# Altium PCB Tesla_Girafe.PcbDoc
Units mm, origin at the board's own origin, x right, y up, seen from the top; angles counter-clockwise.
Board outline 36 x 50 mm, 2 copper layers (Top Layer, Bottom Layer); 12 components, 12 nets, 69 pads, 0 vias.
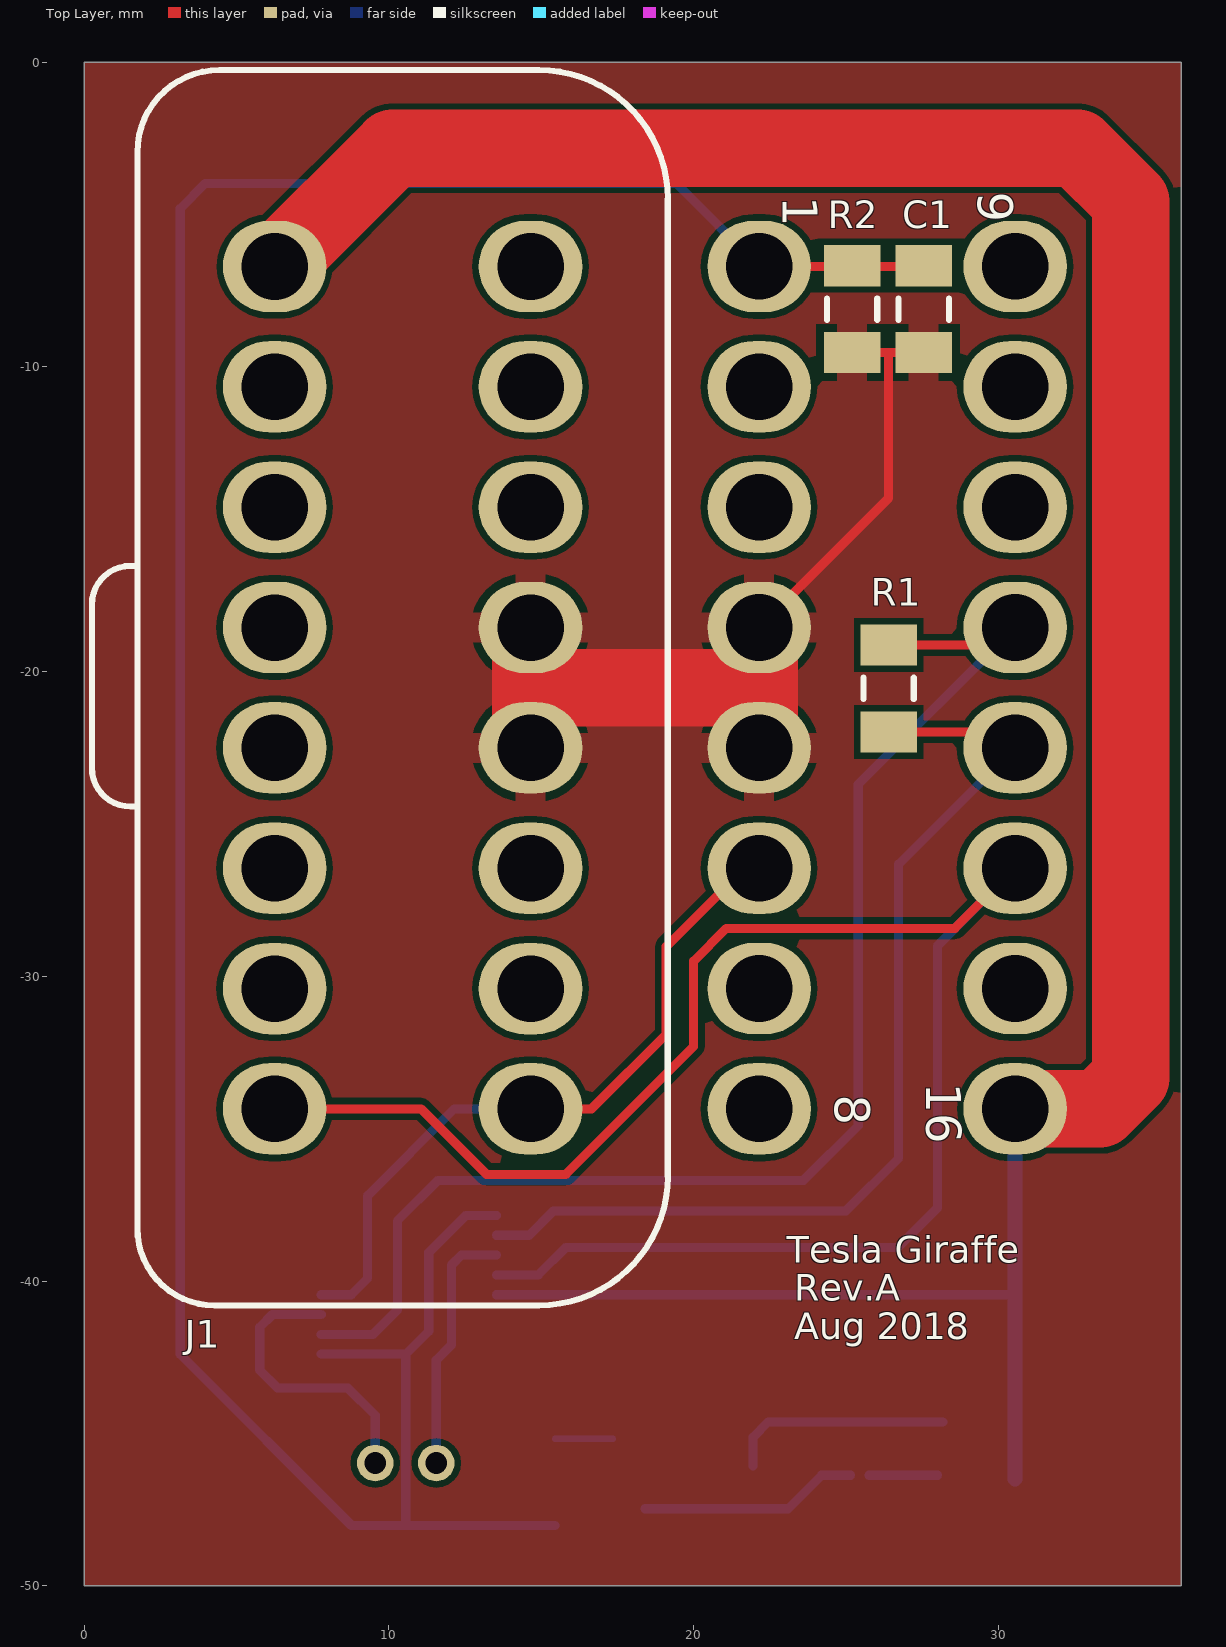
[diagram p0: Top Layer view]
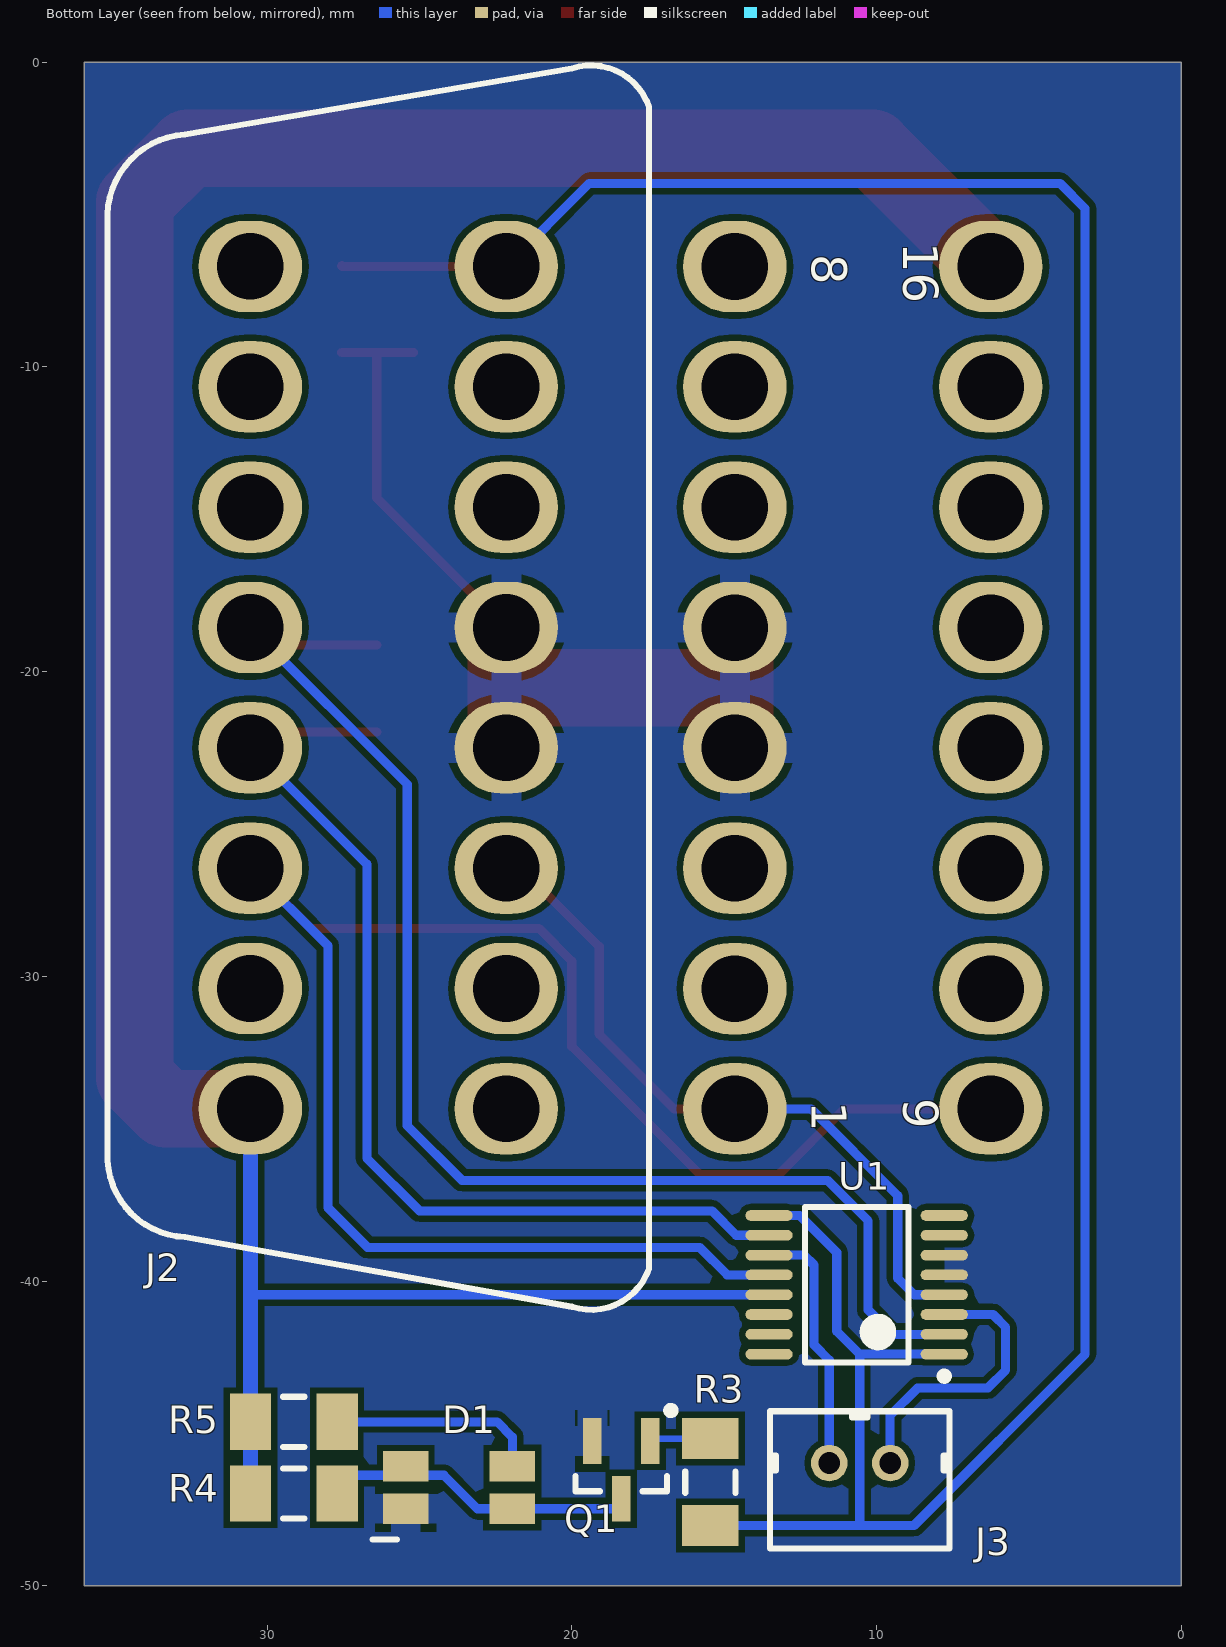
[diagram p1: Bottom Layer view, seen from below]

## Layer stack, top to bottom
Top Solder: solder mask 0.0102, Solder Resist, Dk 3.5
Top Layer: signal copper 0.0356
Dielectric 1: dielectric 0.32, FR-4, Dk 4.8
Bottom Layer: signal copper 0.0356
Bottom Solder: solder mask 0.0102, Solder Resist, Dk 3.5

## Board outline
0,-50 0,0 36,0 36,-50

## Design rules (kind name [scope] priority, off if disabled: settings)
Clearance [All] p1: gap=0.203 ignorepadtopadclearanceinfootprint=FALSE
MinimumSolderMaskSliver [All] p1: minsoldermaskwidth=0.15
PlaneConnect [All] p1: planeconnectstyle=Relief reliefexpansion=0.2 reliefentries=4 reliefconductorwidth=1 reliefairgap=0.2
PolygonConnect [All] p1: connectstyle=Relief reliefconductorwidth=1 reliefentries=4 polygonreliefangle="90 Angle" airgapwidth=0.254
RoutingVias [All] p1: holewidth=0.711 width=1.27 viastyle="Through Hole" minholewidth=0.711 minwidth=1.27 maxholewidth=0.711 maxwidth=1.27
SolderMaskExpansion [All] p1: expansion=0.102
Width [All] p1: maxlimit=3 minlimit=0.203 preferedwidth=0.254 minimp=50.000000 maximp=50.000000 favimp=50.000000
28 further rules are at their usual default settings.

## Components (designator, comment, footprint, x,y, rotation, side; value= is the part's Value field where it differs from the comment)
C1 "1uF 50V" R_1206 27.55,-8.1 r90 top
D1 "67-1363-1-ND" LED_BICOLOR_1210 23.7,-46.775 r180 bottom value=SML-LX1210YGC-TR
J1 "OBD_MALE_TESLA" OBD_MALE 10.446,-20.527 r90 top
J2 "OBD_FEMALE_PANDA" OBD_FEMALE 26.35,-20.525 r90 bottom
J3 "2Pin" JST_PH_2PINS 9.55,-45.975 r0 bottom
Q1 "BC847" SOT23-3N 18.375,-46.2 r270 bottom
R1 "120R" R_1206 26.4,-20.55 r90 top
R2 "100K" R_1206 25.2,-8.1 r90 top
R3 "1K00" R_1206 15.45,-46.6 r270 bottom
R4 "1K00" R_1206 29.125,-46.975 r0 bottom
R5 "1K00" R_1206 29.125,-44.625 r0 bottom
U1 "ADG1436" TSSOP16 10.65,-40.125 r0 bottom

## Footprints (in the part's own frame and the unit in brackets; to place one, negate y for a bottom-side part, rotate by r counter-clockwise, add the part's x,y. Pads: shape width x height; smd on the part's side, far side on the other; paste and mask are expansions set on the pad)
JST_PH_2PINS [mm]
  round 1.2 hole 0.711: 1(0,0) 2(2,0)
  silkscreen extent -1.95,-1.7 3.95,2.8, body extent -1.95,-1.7 3.95,2.8, height 6
LED_BICOLOR_1210 [mm] "Bicolor LED; Body 3.2 x 2.7 mm (LxW typ)"
  rect 1.5x1 smd: 1A(1.75,0.7) 1C(-1.75,0.7) 2A(1.75,-0.7) 2C(-1.75,-0.7)
  silkscreen extent -2.84,-1.71 -2.04,-1.71, body extent -1.61,-1.35 1.61,1.35, height 0.45
OBD_FEMALE [mm] "OBD Female connector"
  oval 3x3.4 hole 2.184: 1(13.825,-4.2) 2(9.875,-4.2) 3(5.925,-4.2) 4(1.975,-4.2) 5(-1.975,-4.2) 6(-5.925,-4.2) 7(-9.875,-4.2) 8(-13.825,-4.2) 9(13.825,4.2) 10(9.875,4.2) 11(5.925,4.2) 12(1.975,4.2) 13(-1.975,4.2) 14(-5.925,4.2) 15(-9.875,4.2) 16(-13.825,4.2)
  silkscreen extent -20.42,-8.89 20.42,8.89
OBD_MALE [mm] "OBD Male connector"
  oval 3x3.4 hole 2.184: 1(-13.825,-4.2) 2(-9.875,-4.2) 3(-5.925,-4.2) 4(-1.975,-4.2) 5(1.975,-4.2) 6(5.925,-4.2) 7(9.875,-4.2) 8(13.825,-4.2) 9(-13.825,4.2) 10(-9.875,4.2) 11(-5.925,4.2) 12(-1.975,4.2) 13(1.975,4.2) 14(5.925,4.2) 15(9.875,4.2) 16(13.825,4.2)
  silkscreen extent -20.27,-8.7 20.28,10.2, body extent -20.27,-8.7 20.28,10.21, height 19.9
R_1206 [mm] "Chip resistor, 2-Leads, Body 3,2x1,6mm, IPC Medium Density"
  rect 1.35x1.85 smd: 1(-1.425,0) 2(1.425,0)
  silkscreen extent -0.35,-0.82 0.35,0.82, body extent -1.7,-0.9 1.7,0.9, height 1.6
SOT23-3N [mm] "SOT23, 3-Leads, Body 2.9x1.3mm, Pitch 0.95mm, Lead Span 2.5mm, IPC Medium Density"
  rect 1.5x0.6 smd: 1(-0.95,0.95) 2(-0.95,-0.95) 3(0.95,0)
  silkscreen extent -2.07,-1.5 0.7,1.75, body extent -0.7,-1.5 0.7,1.5, height 1.1
TSSOP16 [mm] "TSOP, 16-Leads, Body 5,1x4,5mm (max), Pitch 0,65mm, IPC Medium Density"
  oval 1.55x0.35 smd: 1(-2.875,2.275) 2(-2.875,1.625) 3(-2.875,0.975) 4(-2.875,0.325) 5(-2.875,-0.325) 6(-2.875,-0.975) 7(-2.875,-1.625) 8(-2.875,-2.275) 9(2.875,-2.275) 10(2.875,-1.625) 11(2.875,-0.975) 12(2.875,-0.325) 13(2.875,0.325) 14(2.875,0.975) 15(2.875,1.625) 16(2.875,2.275)
  silkscreen extent -3,-2.55 1.7,3.12, body extent -2.25,-2.55 2.25,2.55, height 1.2

## Part data
C1: library part "CAPACITOR NP", "Capacitor (Semiconductor SIM Model)"
D1: library part SML-LX1210YGC-TR, "SMD Dual (Green-Yellow) Led in a 1210 package", Manufacturer=Lumex, Catalog_name=Digikey, Catalog_part_number=67-1363-2-ND, ComponentLink1Description=Datasheet, Part_number=SML-LX1210YGC-TR, Part_type=Diode/LED/Dual
J1: "OBD Male connector"
J2: "OBD Female connector"
Q1: library part NPN, "NPN Bipolar Transistor"
R1 R2 R3 R4 R5: library part RESISTOR, "Semiconductor Resistor"
U1: "1.5 O On Resistance,  ±15 V/12 V/±5 V, iCMOS, Dual SPDT Switch"

## Nets (pads, with @x,y where several pads share a name; then routed paths per layer and width w, separated by ;. In a path a pad name is that pad's centre, name@x,y a point inside that pad or via, vN(x,y) a via of type N, cw(c..) or ccw(c..) an arc to the next point about the centre after c; other vN are vias at no path point)
+12v: J1.16 J2.16 R4.2 R5.2 U1.13 | length 98.7
  Top Layer w2.54: J1.16 10.123,-2.825 32.6,-2.825 34.35,-4.575 34.35,-33.325 33.325,-34.35 J2.16
  Bottom Layer w0.3: U1.13 30.55,-40.45 J2.16
  Bottom Layer w0.5: R4.2@30.55,-46.5 J2.16
CAN_SEL: C1.2 J2.1 R2.2 R3.2 U1.1 U1.9 | length 92.9
  Top Layer w0.3: J2.1 27.525,-6.7 C1.2
  Bottom Layer w0.3: U1.1 10.55,-42.4 ; U1.9 12.518,-37.85 11.303,-39.065 11.303,-41.647 10.55,-42.4 ; R3.2 10.55,-48.025 ; J2.1 19.425,-3.975 3.975,-3.975 3.15,-4.8 3.15,-42.406 8.769,-48.025 10.55,-48.025 ; 10.55,-48.025 10.55,-42.4
CH_CAN+: J1.1 J2.6 U1.4 | length 23.4
  Top Layer w0.203: J2.6@21.675,-26.45 J2.6
  Top Layer w0.3: J1.1 16.648,-34.352 19.1,-31.9 19.1,-29.025 J2.6@21.675,-26.45
  Bottom Layer w0.3: U1.4 8.761,-40.45 9.3,-39.911 9.3,-37.2 12.148,-34.352 J1.1
CH_CAN-: J1.9 J2.14 U1.12 | length 58.6
  Top Layer w0.3: J1.9 11.052,-34.352 13.2,-36.5 15.8,-36.5 20,-32.3 20,-29.5 21.075,-28.425 28.575,-28.425 J2.14
  Bottom Layer w0.3: U1.12 14.9,-39.8 15.8,-38.9 26.7,-38.9 28.004,-37.597 28.004,-28.996 J2.14
EPAS_CAN+: J3.1 U1.3 | length 9.6
  Bottom Layer w0.3: U1.3 6.176,-41.1 5.759,-41.516 5.759,-42.926 6.344,-43.51 8.649,-43.51 9.55,-44.411 J3.1
EPAS_CAN-: J3.2 U1.11 | length 8.3
  Bottom Layer w0.3: J3.2 11.55,-42.596 12.05,-42.096 12.05,-39.475 12.375,-39.15 U1.11
GND: C1.1 D1.2C J1.4 J1.5 J2.4 J2.5 Q1.2 R2.1 U1.5 U1.6 | length 28.5
  Top Layer w0.3: J2.4 26.4,-14.3 26.4,-9.55 ; R2.1 C1.1
  Top Layer w2.54: J1.4 14.646,-20.525 ; J1.5 14.646,-20.525 ; J2.5 22.15,-20.525 ; J2.4 22.15,-20.525 ; 14.646,-20.525 22.15,-20.525
NetD1_1A: D1.1A R5.1 | length 7.4
  Bottom Layer w0.3: D1.1A 21.95,-45.125 22.45,-44.625 R5.1@28.175,-44.625
NetD1_1C: D1.1C D1.2A Q1.3 R4.1 | length 9.5
  Bottom Layer w0.3: Q1.3@18.4,-47.475 D1.2A 23.1,-47.475 24.2,-46.375 D1.1C@25.15,-46.375 ; D1.1C@25.75,-46.375 R4.1@28,-46.375
NetQ1_1: Q1.1 R3.1 | length 1.9
  Bottom Layer w0.203: R3.1 Q1.1@17.35,-45.175
PND_CAN+: J2.12 R1.2 U1.2 | length 44.2
  Top Layer w0.3: R1.2 J2.12@29.975,-19.125
  Bottom Layer w0.3: U1.2 9.475,-41.75 10.274,-40.951 10.274,-38.026 11.6,-36.7 23.6,-36.7 25.4,-34.9 25.4,-23.7 J2.12
PND_CAN-: J2.13 R1.1 U1.10 | length 32.9
  Top Layer w0.3: R1.1 J2.13@30.025,-21.975
  Bottom Layer w0.3: U1.10 14.6,-38.5 15.4,-37.7 25,-37.7 26.727,-35.973 26.727,-26.323 J2.13
pads on no net: J1.2 J1.3 J1.6 J1.7 J1.8 J1.10 J1.11 J1.12 J1.13 J1.14 J1.15 J2.2 J2.3 J2.7 J2.8 J2.9 J2.10 J2.11 J2.15 U1.7 U1.8 U1.14 U1.15 U1.16

## Polygon pours and split planes (outlines as drawn)
GND on Bottom Layer "BOT_GND" (solid, pour order 0): 0,0 36,0 36,-50 0,-50
GND on Top Layer "TOP_GND" (solid, pour order 2): 0,0 36,0 36,-50 0,-50

## Silkscreen, mask and mechanical layers (free items; w line width, h text height)
Top Overlay:
  text "Tesla Giraffe" at 23.05,-39.7 h1.5
  text "Rev.A" at 23.3,-40.95 h1.5
  text "Aug 2018" at 23.3,-42.2 h1.5
  text "," at 25.2,-44.9 h20
Bottom Overlay:
  text "," at 3.651,-45.968 h20
Mechanical 1:
  the board outline again, w0.1

## Text inside footprints (layer, text, board x,y; h text height)
J1: Bottom Overlay "16" at 9.5,-5.9 h1.97 r90; Bottom Overlay "1" at 12.5,-34.1 h1.97 r90; Bottom Overlay "9" at 9.5,-34 h1.97 r90; Bottom Overlay "8" at 12.5,-6.3 h1.97 r90
J2: Top Overlay "9" at 28.95,-4.25 h1.97 r270; Top Overlay "8" at 24.254,-33.894 h1.97 r270; Top Overlay "16" at 27.25,-33.5 h1.97 r270; Top Overlay "1" at 22.55,-4.4 h1.97 r270